# Altium PCB 方舟pcb2.0.PcbDoc
Units mil, origin at the board's own origin, x right, y up, seen from the top; angles counter-clockwise.
Board outline 1374.59 x 1417.25 mil, 2 copper layers (Top Layer, Bottom Layer); 11 components, 7 nets, 29 pads, 9 vias.
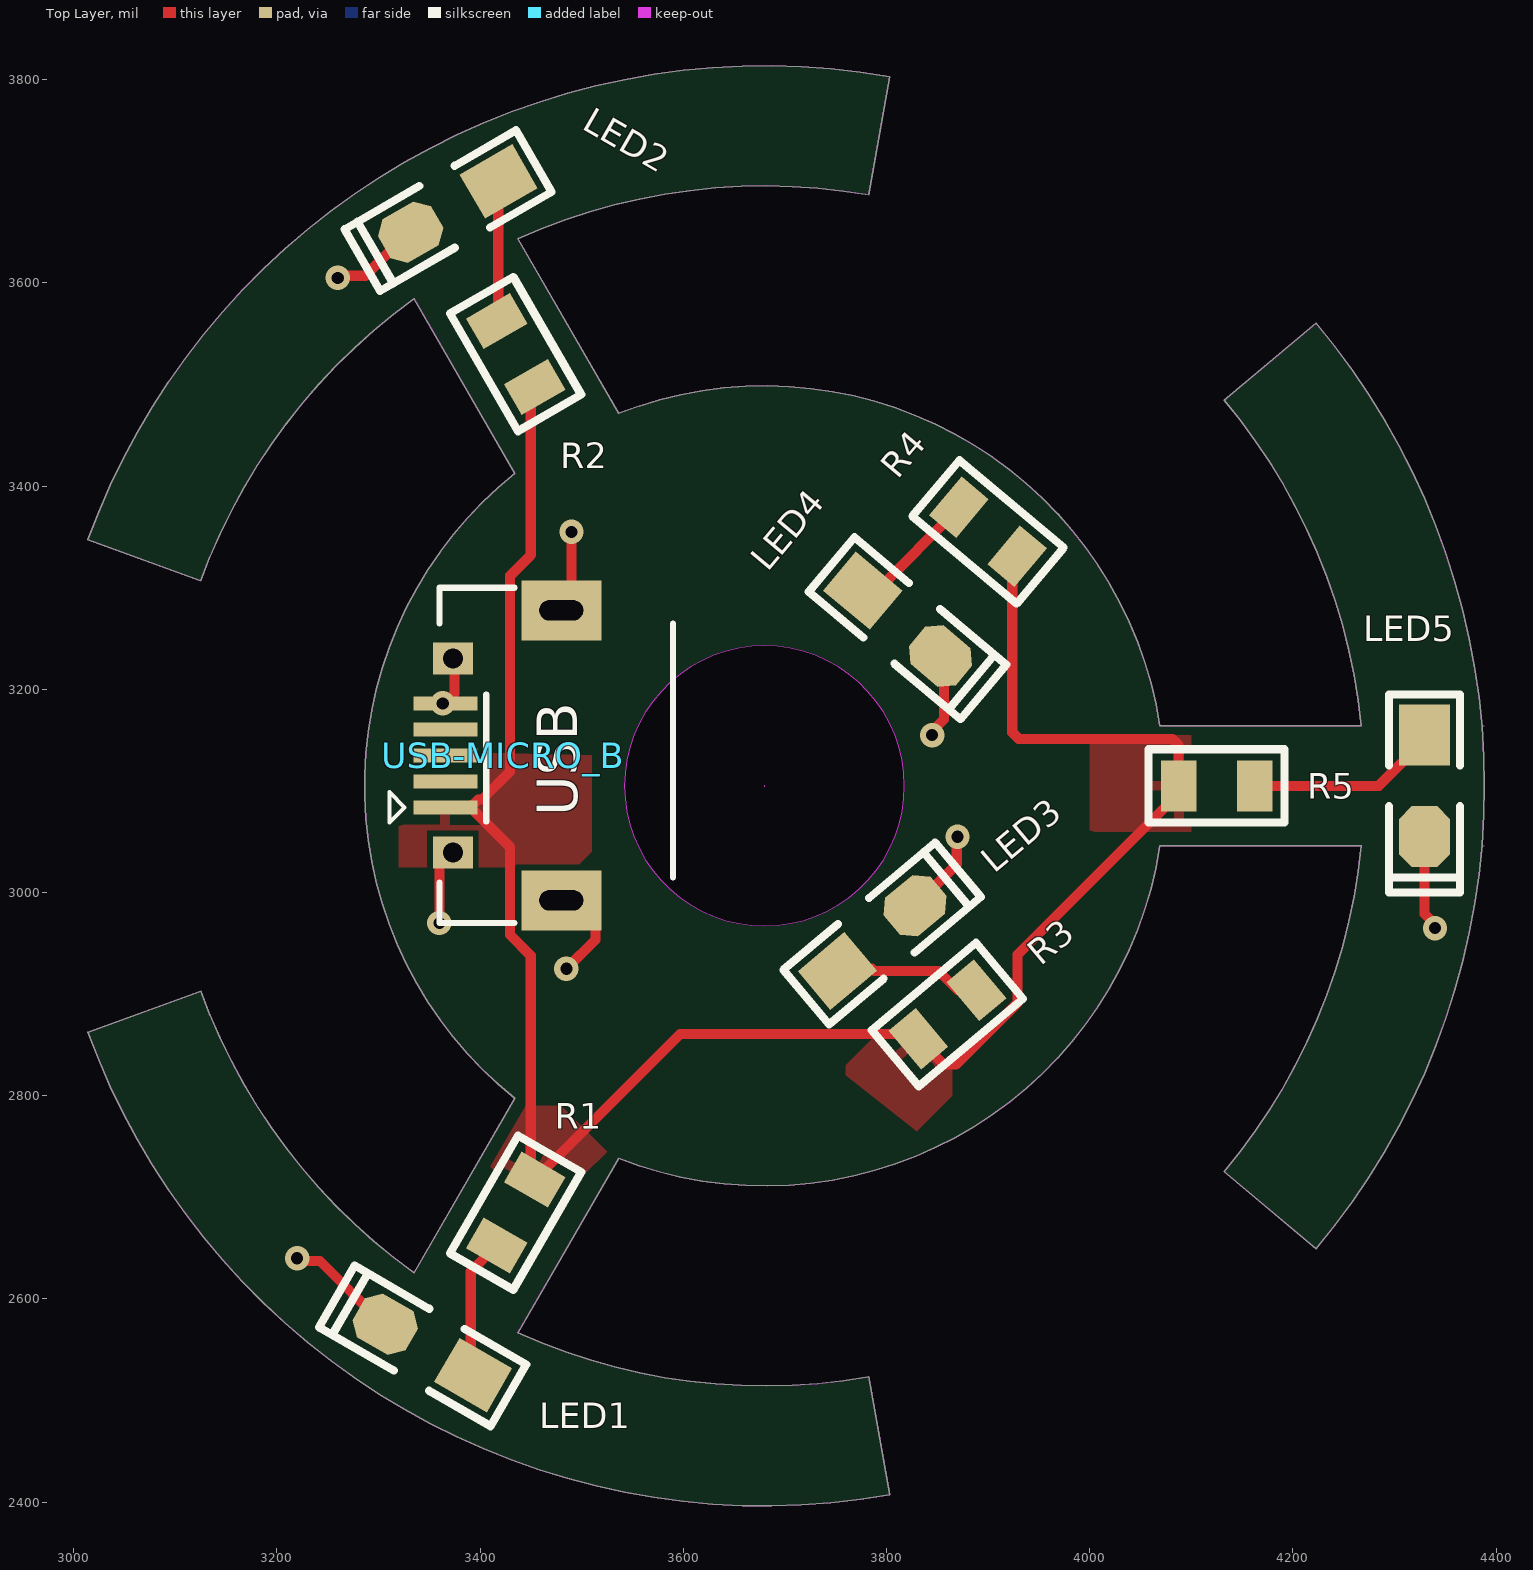
[diagram p0: Top Layer view]
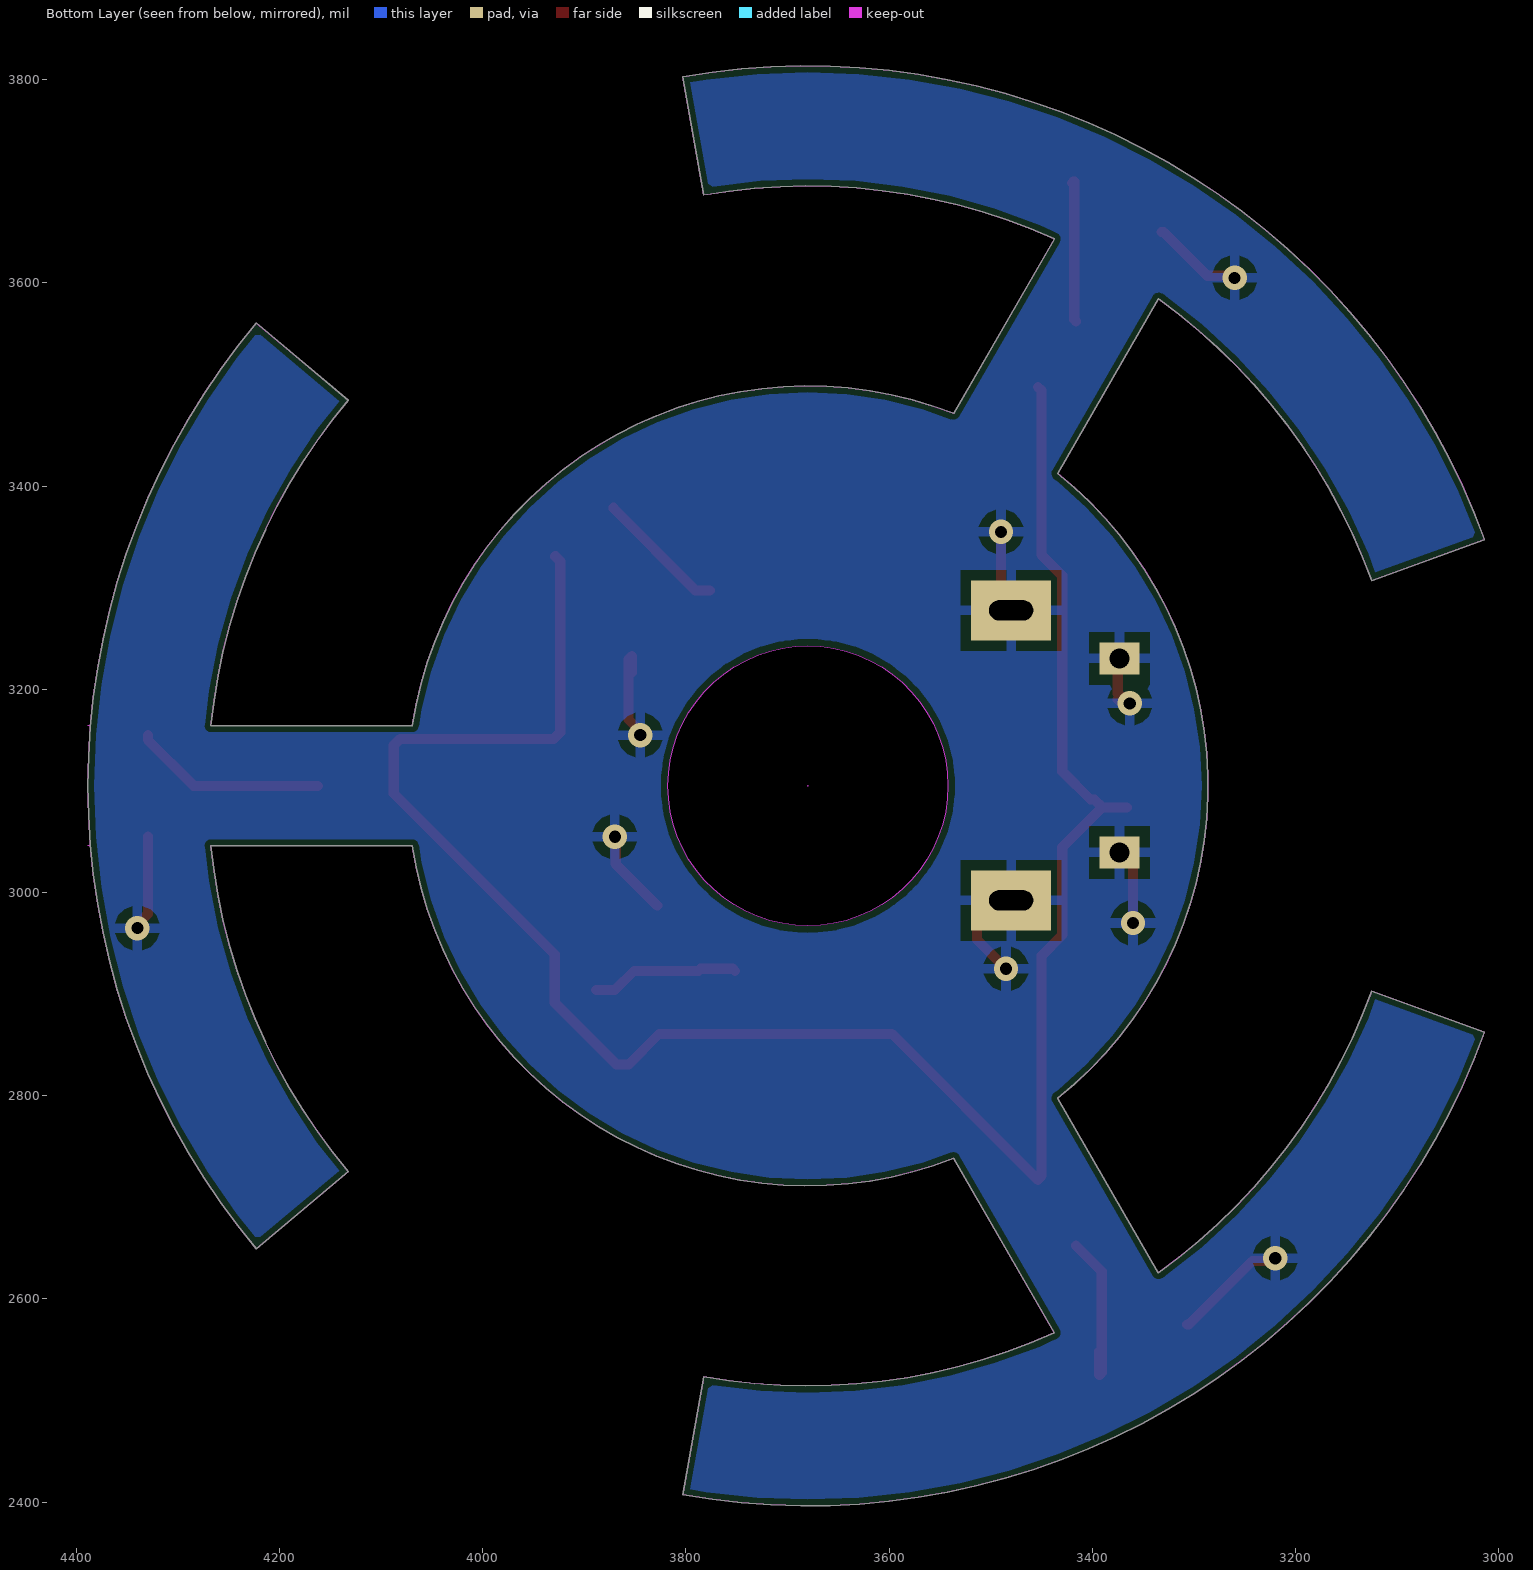
[diagram p1: Bottom Layer view, seen from below]
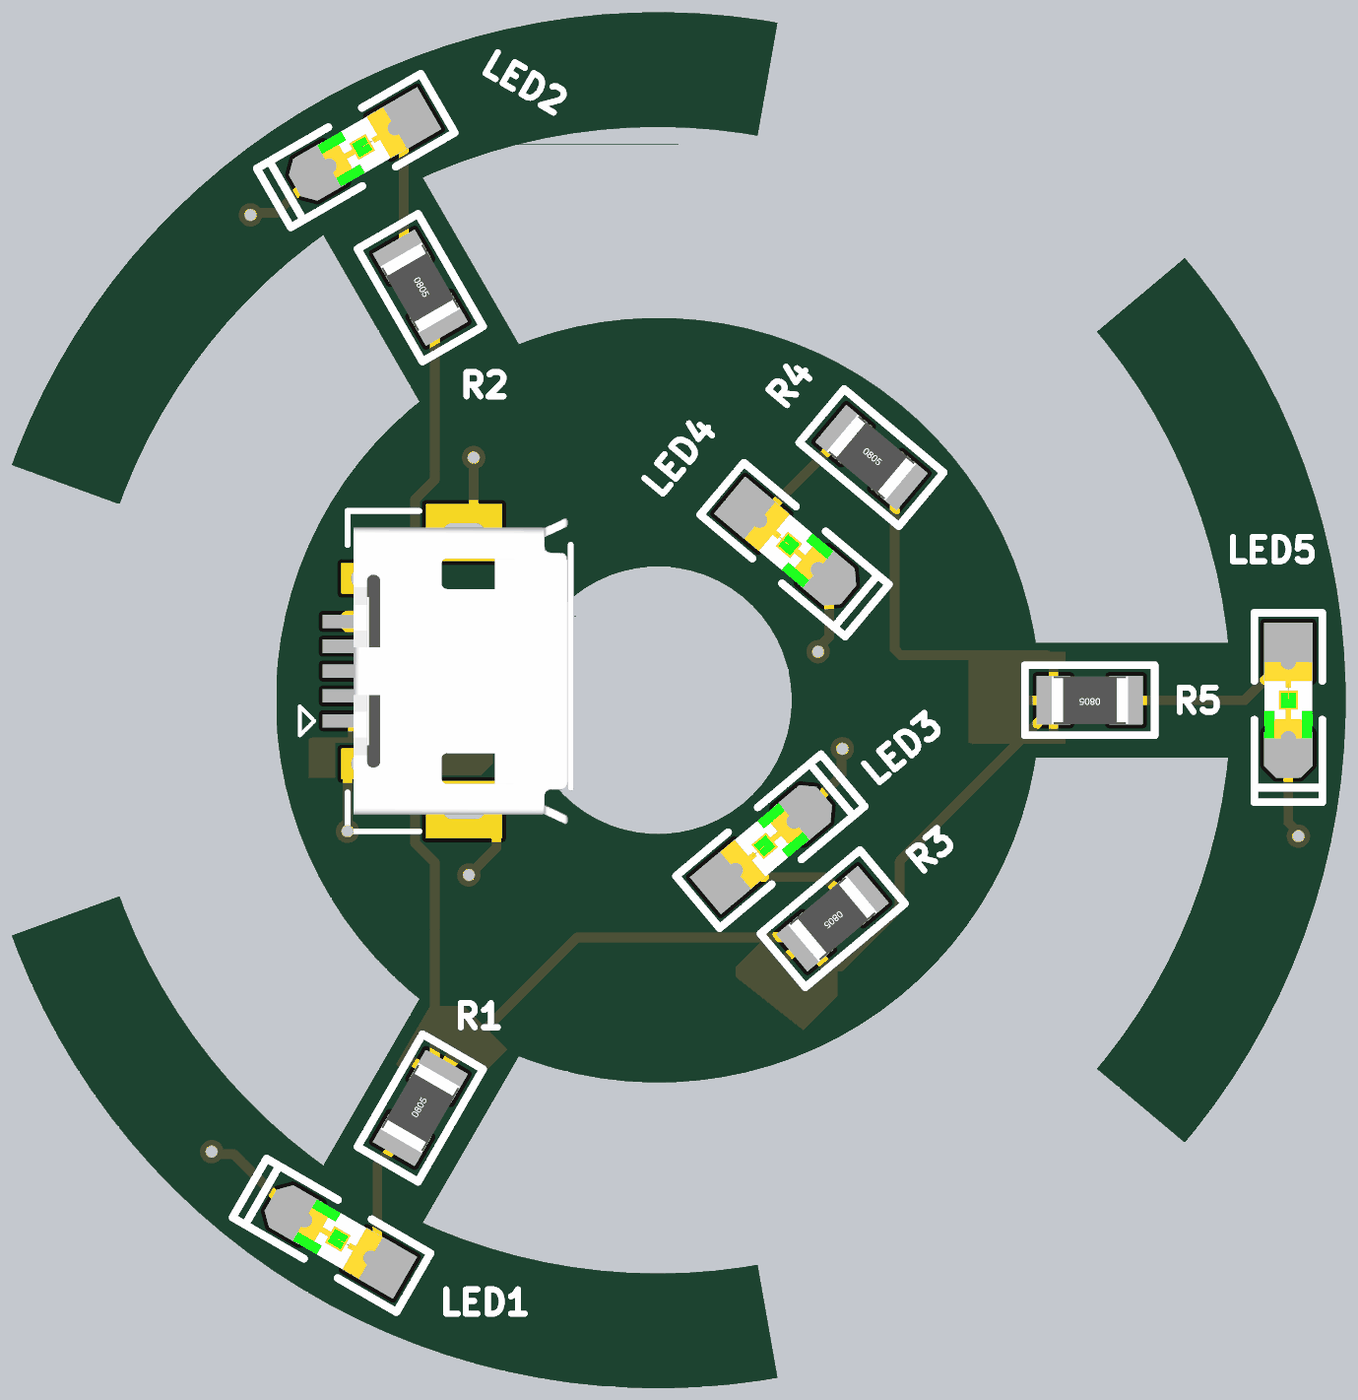
[diagram p2: 3D render of the assembled board from above, using the file's embedded part models]

## Layer stack, top to bottom
Top Solder: solder mask 0.4, Solder Resist, Dk 3.5
Top Layer: signal copper 1.4
Dielectric 1: dielectric 12.6, FR-4, Dk 4.8
Bottom Layer: signal copper 1.4
Bottom Solder: solder mask 0.4, Solder Resist, Dk 3.5

## Board outline
3014.08,2862.62 3125.06,2903.02 ccw(c3680,3105) 3335.06,2625.66 3434.23,2797.43 cw(c3680,3105) 3434.23,3412.57 3335.06,3584.34 ccw(c3680,3105) 3125.06,3306.98 3014.08,3347.38 cw(c3680,3105) 3803.06,3802.9 3782.55,3686.58 ccw(c3680,3105) 3437.35,3643.4 3536.52,3471.62 cw(c3680,3105) 4069.25,3164.06 4267.59,3164.06 ccw(c3680,3105) 4132.39,3484.6 4222.87,3560.52 cw(c3680,3105) 4222.87,2649.48 4132.39,2725.4 ccw(c3680,3105) 4267.59,3045.94 4069.25,3045.94 cw(c3680,3105) 3536.52,2738.38 3437.35,2566.6 ccw(c3680,3105) 3782.55,2523.42 3803.06,2407.1 cw(c3680,3105)
cut-out: 3542.2,3105 ccw(c3680,3105) 3680,2967.2 ccw(c3680,3105) 3817.8,3105 ccw(c3680,3105) 3680,3242.8 ccw(c3680,3105)

## Design rules (kind name [scope] priority, off if disabled: settings)
Clearance [All] p1: gap=6 ignorepadtopadclearanceinfootprint=TRUE
PolygonConnect [All] p1: connectstyle=Relief reliefconductorwidth=10 reliefentries=4 polygonreliefangle="90 Angle" airgapwidth=10
RoomDefinition Sheet1 [InComponentClass('Sheet1')] p1: confinementstyle=ConfineIn formatcopy=TRUE lockcomponents=FALSE outline 1387.4,1260 9692.4,1260 9692.4,1965 1387.4,1965
RoutingVias [All] p1: holewidth=28 width=50 viastyle="Through Hole" minholewidth=28 minwidth=50 maxholewidth=28 maxwidth=50
SolderMaskExpansion [All] p1: expansion=4 istentingtop=FALSE
Width [All] p1: maxlimit=10 minlimit=10 preferedwidth=10
30 further rules are at their usual default settings.

## Components (designator, comment, footprint, x,y, rotation, side; value= is the part's Value field where it differs from the comment)
LED1 "红色" "LED 0805G" 3350,2550 r150 top
LED2 "红色" "LED 0805G" 3375,3675 r210 top
LED3 "红色" "LED 0805G" 3790,2955 r40 top
LED4 "红色" "LED 0805G" 3815,3265 r320 top
LED5 "红色" "LED 0805G" 4329.61,3105 r270 top
R1 "1K" "R 0805_L" 3435,2685 r60 top
R2 "1K" "R 0805_L" 3435,3530 r300 top
R3 "1K" "R 0805_L" 3860,2880 r220 top
R4 "1K" "R 0805_L" 3900,3355 r320 top
R5 "1K" "R 0805_L" 4125,3105 r180 top
USB-MICRO_B "USB-5P" USB-MICRO_A 3480,3135 r90 top

## Footprints (in the part's own frame and the unit in brackets; to place one, negate y for a bottom-side part, rotate by r counter-clockwise, add the part's x,y. Pads: shape width x height; smd on the part's side, far side on the other; paste and mask are expansions set on the pad)
"LED 0805G" [mil] "绿色0805LED                              淘宝ID:黄晶宝石"
  rect 60x50 smd: 1(-50,0)
  oct 60x50 smd: 2(50,0)
  silkscreen extent -90,-35 105,35, body extent -39,-25 39,25, height 32
"R 0805_L" [mil] "1/8W贴片电阻"
  rect 35x50 smd: 1(-37.4,0) 2(37.4,0)
  silkscreen extent -67,-36 67,36, body extent -39,-25 39,25, height 20
USB-MICRO_A [mm] "micro型USB ，5.7*7.8*2.5mm"
  rect 0.35x1.6 smd: 1(-1.3,2.9) 2(-0.65,2.9) 3(0,2.9) 4(0.65,2.9) 5(1.3,2.9)
  rect 1.5x2 hole 0.5 slot 1.1 at 90 deg: 5(-3.625,0) 5(3.625,0)
  rect 0.8x1 hole 0.5: 5(-2.425,2.71) 5(2.425,2.71)
  silkscreen extent -4.19,-2.79 4.19,4.3, body extent -4,-2.71 4,2.89, height 2.8

## Part data
LED1 LED2 LED3 LED4 LED5: library part LED-SMD, "贴片LED", BOM名称=贴片LED, 学习资源=https://shop463601444.taobao.com, 版权归属="封装库来自淘宝 ID：黄晶宝石"
R1 R2 R3 R4 R5: library part R, "贴片电阻", BOM名称=贴片电阻, 封装库来自淘宝卖家 ID：黄晶宝石=其他店铺购入均为盗版，不享受售后技术支持服务，请立即申请退款, 版权归属="来自淘宝 ID：黄晶宝石", 联系售后=https://shop463601444.taobao.com
USB-MICRO_B: "微型USB母座", BOM名称=微型USB母座, 学习资源=https://shop463601444.taobao.com

## Via types
v1: diameter 24, hole 12, Top Layer to Bottom Layer, tented both sides, 9 vias

## Nets (pads, with @x,y where several pads share a name; then routed paths per layer and width w, separated by ;. In a path a pad name is that pad's centre, name@x,y a point inside that pad or via, vN(x,y) a via of type N, cw(c..) or ccw(c..) an arc to the next point about the centre after c; other vN are vias at no path point)
GND: LED1.2 LED2.2 LED3.2 LED4.2 LED5.2 USB-MICRO_B.5 | length 797.3
  Top Layer w10: v1(3220,2640) 3222.68,2637.32 3242.55,2637.32 3304.87,2575 LED1.2 ; v1(3260,3605) 3262.13,3607.13 3287,3607.13 3329.87,3650 LED2.2 ; v1(3360,2970) 3360,3028.78 3370.75,3039.53 USB-MICRO_B.5@3373.31,3039.53 ; v1(3363.27,3186.18) 3371.18,3186.18 USB-MICRO_B.5@3375,3190 ; v1@3371.93,3193.07 3375,3196.14 3375,3228.78 USB-MICRO_B.5@3373.31,3230.47 ; USB-MICRO_B.5@3480,2992.28 3489.09,2992.28 3513.61,2967.76 3513.61,2953.61 v1(3485,2925) ; USB-MICRO_B.5@3480,3277.72 3490,3287.72 v1(3490,3355) ; LED3.2@3831.52,2990.35 LED3.2 3869.16,3028 3869.16,3054.16 v1(3870,3055) ; v1(3845,3155) 3845,3158.79 3856.52,3170.3 3856.52,3229.65 LED4.2 LED4.2@3853.3,3216.51 ; LED5.2 4329.61,2979.18 4340,2968.79 v1(4340,2965)
NetLED1_1: LED1.1 R1.1 | length 162.5
  Top Layer w10: LED1.1@3393.3,2548.3 LED1.1 3390.8,2527.5 3390.8,2627.11 R1.1
NetLED2_1: LED2.1 R2.1 | length 140.8
  Top Layer w10: R2.1 3417.92,3564.02 3417.92,3699.62 LED2.1 LED2.1@3420,3698.3
NetLED3_1: LED3.1 R3.1 | length 146.6
  Top Layer w10: LED3.1 3753.9,2925.06 3785.75,2925.06 3787.95,2922.86 3851.19,2922.86 3870.01,2904.05 R3.1
NetLED4_1: LED4.1 R4.1 | length 143.2
  Top Layer w10: LED4.1@3790.81,3297.14 LED4.1 3790.37,3297.14 3871.34,3378.12 R4.1
NetLED5_1: LED5.1 R5.1 | length 190.8
  Top Layer w10: R5.1 4284.61,3105 4329.61,3150 LED5.1
VCC: R1.2 R2.2 R3.2 R4.2 R5.2 USB-MICRO_B.1 | length 2095.4
  Top Layer w10: USB-MICRO_B.1 USB-MICRO_B.1@3390.43,3083.82 ; R2.2 3449.95,3493.86 3449.95,3332.12 3429.63,3311.8 3429.63,3119.27 3401.88,3091.52 3398.13,3091.52 USB-MICRO_B.1@3390.43,3083.82 ; R4.2 3923.83,3326.14 3923.83,3157.63 3930.18,3151.27 4081.33,3151.27 4087.6,3145 R5.2 4087.6,3097.5 3929.13,2939.03 3929.13,2891.59 3868.19,2830.65 3856.67,2830.65 3826.53,2860.78 3597.1,2860.78 R1.2 3449.95,2721.14 3449.95,2937.88 3429.63,2958.2 3429.63,3044.62 USB-MICRO_B.1@3390.43,3083.82
pads on no net: USB-MICRO_B.2 USB-MICRO_B.3 USB-MICRO_B.4

## Polygon pours and split planes (outlines as drawn)
VCC on Top Layer "VCC_L01_P004" (solid, remove dead copper, pour order 4): 4100,3155 4100,3060 4005,3060 4000,3055 4000,3155
VCC on Top Layer "VCC_L01_P003" (solid, remove dead copper, pour order 3): 3760,2820 3760,2830 3815,2885 3865,2835 3865,2800 3830,2765
VCC on Top Layer "VCC_L01_P002" (solid, remove dead copper, pour order 2): 3410,2730 3455,2685 3490,2685 3490,2710 3525,2745 3480,2790 3445,2790
VCC on Top Layer "VCC_L01_P000" (solid, remove dead copper, pour order 0): 3320,3140 3320,3025 3495,3025 3510,3040 3510,3135
GND on Bottom Layer "GND_L02_P005" (solid, remove dead copper, pour order 5): 3013.83,2862.53 cw(c3014.08,2862.62) 3013.99,2862.87 3124.97,2903.27 cw(c3125.06,2903.02) 3124.98,2903.27 3124.97,2903.27 cw(c3125.06,2903.02) 3125.31,2903.12 cw(c3125.06,2903.02) 3125.31,2903.1 ccw(c3680,3105) 3334.98,2626.05 3433.89,2797.37 cw(c3680,3105) 3433.89,3412.63 3334.98,3583.95 ccw(c3680,3105) 3125.31,3306.9 cw(c3125.06,3306.98) 3125.31,3306.88 cw(c3125.06,3306.98) 3124.97,3306.73 3124.98,3306.73 ccw(c3125.06,3306.98) 3125.31,3306.89 3124.98,3306.73 cw(c3125.06,3306.98) 3124.97,3306.73 3013.99,3347.13 3013.98,3347.13 ccw(c3014.08,3347.38) 3013.99,3347.13 cw(c3014.08,3347.38) 3013.83,3347.47 cw(c3680,3105) 3803.1,3803.16 cw(c3803.06,3802.9) 3803.32,3802.9 cw(c3803.06,3802.9) 3803.32,3802.9 cw(c3803.06,3802.9) 3803.32,3802.85 3803.32,3802.9 3803.32,3802.85 cw(c3782.55,3686.58) 3782.81,3686.53 3782.5,3686.32 cw(c3782.55,3686.58) 3782.51,3686.32 3782.49,3686.32 ccw(c3680,3105) 3437.72,3643.28 3536.64,3471.95 cw(c3680,3105) 4069.47,3164.32 4267.3,3164.32 ccw(c3680,3105) 4132.19,3484.43 cw(c4132.39,3484.6) 4132.22,3484.8 4222.69,3560.72 cw(c4222.87,3560.52) 4222.7,3560.72 cw(c4222.87,3560.52) 4223.07,3560.69 cw(c3680,3105) 4386.44,3164.32 4388.66,3164.32 cw(c4388.66,3164.06) 4388.93,3164.06 cw(c4388.66,3164.06) 4388.66,3163.79 4386.48,3163.79 cw(c3680,3105) 4388.93,3105 cw(c3680,3105) 4386.48,3046.21 4388.66,3046.21 cw(c4388.66,3045.94) 4388.93,3045.94 cw(c4388.66,3045.94) 4388.66,3045.68 4386.44,3045.68 cw(c3680,3105) 4223.07,2649.31 cw(c4222.87,2649.48) 4222.7,2649.28 4222.69,2649.28 ccw(c4222.87,2649.48) 4222.7,2649.28 4222.69,2649.28 4132.22,2725.2 cw(c4132.39,2725.4) 4132.19,2725.57 ccw(c3680,3105) 4267.3,3045.68 4069.47,3045.68 cw(c3680,3105) 3536.64,2738.05 3437.72,2566.72 ccw(c3680,3105) 3782.49,2523.68 cw(c3782.55,2523.42) 3782.51,2523.68 3782.5,2523.68 cw(c3782.55,2523.42) 3782.81,2523.47 3803.32,2407.15 cw(c3803.06,2407.1) 3803.32,2407.1 ccw(c3803.06,2407.1) 3803.32,2407.15 3803.32,2407.1 cw(c3803.06,2407.1) 3803.1,2406.84 cw(c3680,3105)

## Keep-outs
Keep-Out Layer:
  circle w0.25: c3680,3105 r0.12
  circle w0.5: c3680,3105 r137.8
  lines w0.5: 4386.2,3045.94 4388.66,3045.94 ; 4386.2,3164.06 4388.66,3164.06 ; 3014.08,2862.62 ccw(c3680,3105) 3803.06,2407.1 3782.55,2523.42 cw(c3680,3105) 3437.35,2566.6 3536.52,2738.38 ccw(c3680,3105) 4069.25,3045.94 4267.59,3045.94 cw(c3680,3105) 4132.39,2725.4 4222.87,2649.48 ccw(c3680,3105) 4222.87,3560.52 4132.39,3484.6 cw(c3680,3105) 4267.59,3164.06 4069.25,3164.06 ccw(c3680,3105) 3536.52,3471.62 3437.35,3643.4 cw(c3680,3105) 3782.55,3686.58 3803.06,3802.9 ccw(c3680,3105) 3014.08,3347.38 3125.06,3306.98 cw(c3680,3105) 3335.06,3584.34 3434.23,3412.57 ccw(c3680,3105) 3434.23,2797.43 3335.06,2625.66 cw(c3680,3105) 3125.06,2903.02 3014.08,2862.62

## Silkscreen, mask and mechanical layers (free items; w line width, h text height)
Mechanical 1:
  lines w0.5: 112490.38,60862.76 112490.38,60865.22 ; 112608.5,60862.76 112608.5,60865.22 ; 112850.38,60312.76 112850.38,60315.22 ; 112968.5,60312.76 112968.5,60315.22

## Text inside footprints (layer, text, board x,y; h text height)
USB-MICRO_B: Top Overlay "USB" at 3495.83,3075 h40 r90